# Altium PCB bms_slave.PcbDoc (part 2 of 2)
Units mm, origin at the board's own origin, x right, y up, seen from the top; angles counter-clockwise.
Board outline 145.01 x 85.89 mm, 4 copper layers (Top, Internal Plane 1, Internal Plane 2, Bottom), stack 2.023 mm thick; 168 components, 117 nets, 483 pads, 146 vias.
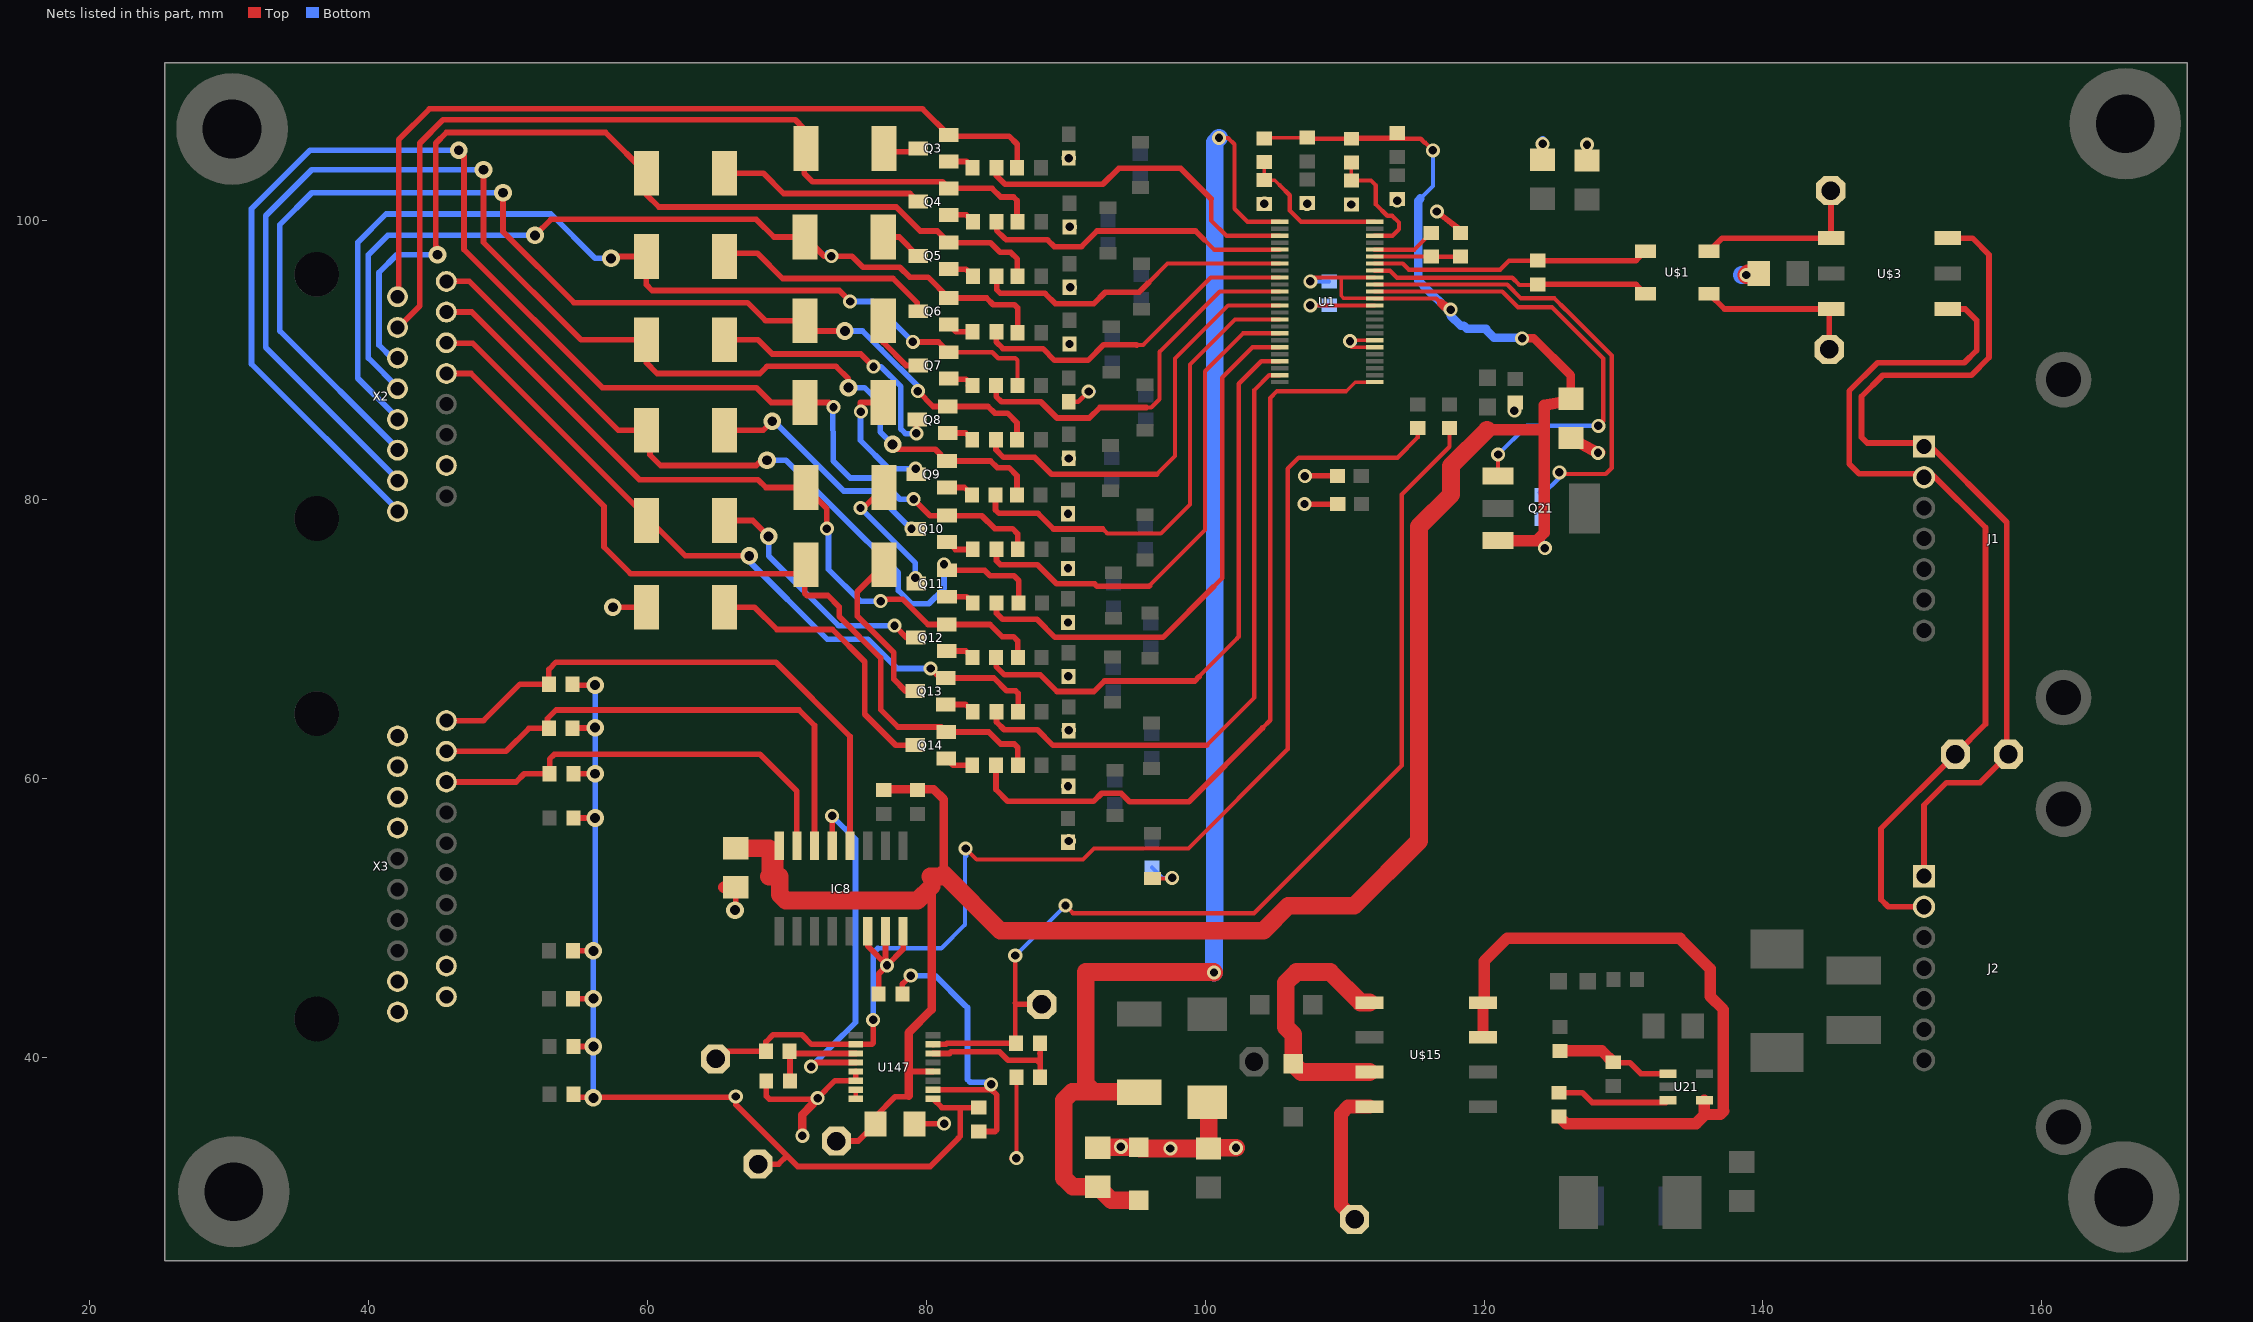
[diagram p4: the nets of this part, all layers, seen from the top]

## Via types
v1: diameter 1.006/1.006 (per signal layer), hole 0.6, Top to Bottom, 118 vias
v2: diameter 1.27, hole 0.711, Top to Bottom, 27 vias
v3: diameter 1.27/1.27 (per signal layer), hole 0.711, Top to Bottom, 1 vias

## Nets (pads, with @x,y where several pads share a name; then routed paths per layer and width w, separated by ;. In a path a pad name is that pad's centre, name@x,y a point inside that pad or via, vN(x,y) a via of type N, cw(c..) or ccw(c..) an arc to the next point about the centre after c; other vN are vias at no path point) (continued)
NetIC8_12: IC8.12 R74.1 X3.1 | length 41.4
  Top w0.305: R74.1@52.82,66.878 R74.1@52.846,66.853
  Top w0.406: X3.1@45.593,64.135 48.26,64.135 50.876,66.751 R74.1@52.947,66.751 52.947,67.806 53.467,68.326 63.5,68.326 69.215,68.326 74.536,63.005 IC8.12@74.536,55.169 ; R74.1@52.846,66.853 R74.1@52.857,66.841
NetIC8_13: IC8.13 U147.12 | length 25.5
  Top w0.406: v1(71.755,39.319) 71.78,39.319 72.085,39.624 74.951,39.624 U147.12@74.956,39.619 ; v1(73.254,57.302) 73.266,57.29 IC8.13@73.266,55.169
  Bottom w0.406: v1(71.755,39.319) 73.254,40.818 74.93,42.494 74.93,55.626 v1(73.254,57.302)
NetIC8_14: IC8.14 R73.1 X3.3 | length 37.2
  Top w0.406: X3.3@45.593,61.935 49.87,61.935 51.511,63.576 R73.1@52.947,63.576 ; R73.1@52.846,63.602 52.846,64.276 53.467,64.897 70.891,64.897 71.996,63.792 IC8.14@71.996,55.169
NetIC8_15: IC8.15 R72.1 X3.5 | length 31.6
  Top w0.406: X3.5@45.593,59.735 50.591,59.735 51.181,60.325 R72.1@52.998,60.325 52.998,61.38 53.34,61.722 64.592,61.722 68.072,61.722 70.726,59.068 IC8.15@70.726,55.169
NetJ1_1: J1.1 J2.1 TP3.TP U$3.P$3 | length 66.3
  Top w0.406: J2.1@151.544,52.985 151.544,58.072 153.162,59.69 155.575,59.69 TP3.TP@157.607,61.722 157.48,61.849 157.48,78.359 151.799,84.04 147.481,84.04 147.066,84.455 147.066,87.376 148.59,88.9 154.94,88.9 156.21,90.17 156.21,97.536 155.016,98.73 U$3.P$3@153.264,98.73
NetJ1_2: J1.2 J2.2 TP4.TP U$3.P$1 | length 64.9
  Top w0.406: J2.2@151.544,50.785 148.986,50.785 148.463,51.308 148.463,56.388 TP4.TP@153.797,61.722 155.956,63.881 155.956,77.978 152.094,81.84 146.887,81.84 146.177,82.55 146.177,87.757 148.209,89.789 154.432,89.789 155.321,90.678 155.321,92.837 154.508,93.65 U$3.P$1@153.264,93.65
NetQ3_1: Q3.1 R36.1 | length 1.9
  Top w0.406: Q3.1@81.618,104.219 82.891,104.219 R36.1@83.326,103.784
NetQ3_2: Q3.2 R1.1 X2.2 | length 59.2
  Top w0.406: X2.2@42.176,94.553 42.176,105.803 44.374,108.001 58.903,108.001 79.736,108.001 Q3.2@81.618,106.119 81.692,106.045 85.941,106.045 86.526,105.46 R1.1@86.526,103.784
NetQ3_3: Q3.3 R6.2 | length 2.7
  Top w0.406: R6.2@76.841,104.927 79.177,104.927 Q3.3@79.418,105.169
NetQ4_1: Q4.1 R37.1 | length 1.9
  Top w0.406: Q4.1@81.618,100.396 82.866,100.396 R37.1@83.351,99.911
NetQ4_2: Q4.2 R6.1 R7.1 X2.4 | length 63.1
  Top w0.406: X2.4@42.176,92.353 43.688,93.865 43.688,105.537 45.364,107.213 66.192,107.213 70.612,107.213 71.247,106.578 R6.1@71.247,104.921 ; R6.1@71.241,104.927 R6.1@71.247,104.921 ; R7.1@86.552,99.911 86.512,99.95 86.512,101.422 86.258,101.676 85.344,101.676 84.724,102.296 Q4.2@81.618,102.296 81.146,102.768 71.857,102.768 71.247,103.378 R6.1@71.247,104.921
NetQ4_3: Q4.3 R8.2 | length 14.7
  Top w0.406: R8.2@65.532,103.378 68.326,103.378 69.774,101.93 69.977,101.93 78.834,101.93 Q4.3@79.418,101.346
NetQ5_1: Q5.1 R38.1 | length 1.9
  Top w0.406: Q5.1@81.618,96.51 82.841,96.51 R38.1@83.351,95.999
NetQ5_2: Q5.2 R8.1 R9.1 X2.6 | length 66.2
  Top w0.406: v2(44.958,97.536) 44.958,98.044 44.831,98.171 44.831,105.537 45.593,106.299 57.011,106.299 R8.1@59.932,103.378 ; R8.1@59.932,101.866 60.833,100.965 68.713,100.965 77.851,100.965 79.578,99.238 80.79,99.238 Q5.2@81.618,98.41 84.597,98.41 85.293,97.714 86.055,97.714 86.538,97.231 86.538,96.013 R9.1@86.552,95.999
  Bottom w0.406: X2.6@42.176,90.153 41.673,90.153 40.767,91.059 40.767,96.266 42.037,97.536 v2(44.958,97.536)
NetQ5_3: Q5.3 R10.2 | length 3.1
  Top w0.406: R10.2@76.917,98.806 78.072,98.806 Q5.3@79.418,97.46
NetQ6_1: Q6.1 R39.1 | length 1.9
  Top w0.406: Q6.1@81.618,92.535 82.141,92.011 R39.1@83.326,92.011
NetQ6_2: Q6.2 R10.1 R11.1 X2.8 | length 62.9
  Top w0.406: v2(51.943,98.933) 53.086,100.076 67.818,100.076 69.088,98.806 R10.1@71.317,98.806 72.689,97.434 v1(73.203,97.434) 74.676,97.434 75.463,96.647 78.105,96.647 78.816,95.936 80.117,95.936 Q6.2@81.618,94.435 84.331,94.435 84.811,93.955 86.335,93.955 86.563,93.726 86.563,91.96 R11.1@86.552,91.948
  Bottom w0.406: X2.8@42.176,87.953 40.005,90.124 40.005,97.536 41.402,98.933 v2(51.943,98.933) ; v1@72.949,97.688 v1(73.203,97.434)
NetQ6_3: Q6.3 R12.2 | length 16
  Top w0.406: R12.2@65.538,97.409 65.773,97.644 67.894,97.644 69.704,95.834 77.622,95.834 79.35,94.107 79.35,93.553 Q6.3@79.418,93.485
NetQ7_1: Q7.1 R40.1 | length 2.2
  Top w0.305: Q7.1@81.618,88.649 Q7.1@81.646,88.621 ; R40.1@82.982,88.163 R40.1@83.313,88.163
  Top w0.406: Q7.1@81.646,88.621 82.856,88.621 R40.1@83.313,88.163
NetQ7_2: Q7.2 R12.1 R13.1 X2.10 | length 69.5
  Top w0.305: Q7.2@81.618,90.548 84.737,90.548 85.166,90.119 86.385,90.119 86.538,89.967 R13.1@86.539,88.163 R13.1@86.539,88.163
  Top w0.406: v2(57.404,97.282) 57.531,97.409 R12.1@59.938,97.409 59.938,95.383 60.35,94.971 68.58,94.971 73.762,94.971 v1(74.549,94.183) ; v1(79.045,91.288) 80.879,91.288 Q7.2@81.618,90.548
  Bottom w0.406: X2.10@42.176,85.753 39.243,88.686 39.243,98.425 41.275,100.457 53.086,100.457 56.261,97.282 v2(57.404,97.282) ; v1(74.549,94.183) 76.149,94.183 v1(79.045,91.288)
NetQ7_3: Q7.3 R14.2 | length 4.7
  Top w0.406: R14.2@76.917,92.812 76.937,92.792 76.937,91.237 78.575,89.599 Q7.3@79.418,89.599
NetQ8_1: Q8.1 R41.1 | length 1.9
  Top w0.406: Q8.1@81.555,84.762 82.815,84.762 R41.1@83.3,84.277
NetQ8_2: Q8.2 R14.1 R15.1 X2.12 | length 83.4
  Top w0.406: v2(49.657,101.981) 49.657,99.187 54.737,94.107 67.183,94.107 68.478,92.812 R14.1@71.317,92.812 71.298,92.792 72.015,92.075 v2(74.168,92.075) ; v1(79.4,87.757) 80.495,86.662 Q8.2@81.555,86.662 84.432,86.662 84.912,86.182 85.827,86.182 86.512,85.496 86.512,84.291 R15.1@86.526,84.277
  Bottom w0.406: X2.12@42.176,83.553 33.655,92.074 33.655,99.695 35.941,101.981 v2(49.657,101.981) ; v2(74.168,92.075) 75.438,92.075 76.759,90.754 79.4,88.113 v1(79.4,87.757)
NetQ8_3: Q8.3 R16.2 | length 19.3
  Top w0.406: R16.2@65.538,91.44 67.945,91.44 68.961,90.424 73.025,90.424 75.311,90.424 v1(76.225,89.51) ; v1(79.299,84.734) 79.299,85.657 Q8.3@79.354,85.712
  Bottom w0.406: v1(76.225,89.51) 76.759,89.51 78.181,88.087 78.181,85.039 78.511,84.709 79.273,84.709 v1(79.299,84.734)
NetQ9_1: Q9.1 R42.1 | length 2
  Top w0.406: Q9.1@81.491,80.851 82.739,80.851 R42.1@83.275,80.315
NetQ9_2: Q9.2 R16.1 R17.1 X2.14 | length 94.6
  Top w0.406: v2(48.26,103.632) 48.26,98.425 55.245,91.44 R16.1@59.938,91.44 59.938,89.795 60.706,89.027 68.072,89.027 68.58,89.535 73.533,89.535 74.422,88.646 v2(74.422,88.011) ; v2(77.597,83.947) 77.953,83.591 80.65,83.591 Q9.2@81.491,82.751 84.61,82.751 85.09,82.271 85.928,82.271 86.512,81.686 86.512,80.326 R17.1@86.501,80.315
  Bottom w0.406: X2.14@42.176,81.353 32.639,90.89 32.639,100.33 35.941,103.632 v2(48.26,103.632) ; v2(74.422,88.011) 75.565,88.011 76.708,86.868 76.708,84.836 v2(77.597,83.947)
NetQ9_3: Q9.3 R18.2 | length 9.6
  Top w0.406: v1(75.311,86.284) 75.292,86.944 R18.2@76.917,86.944 ; v1(79.248,82.194) 79.291,82.151 Q9.3@79.291,81.801
  Bottom w0.406: v1(75.311,86.284) 75.286,85.369 75.286,84.226 77.318,82.194 v1(79.248,82.194)
NetQ10_1: Q10.1 R43.1 | length 2.1
  Top w0.406: Q10.1@81.491,76.926 81.57,76.926 82.093,76.403 83.326,76.403 R43.1@83.338,76.416
NetQ10_2: Q10.2 R18.1 R19.1 X2.16 | length 108.3
  Top w0.305: Q10.2@81.491,78.826 84.038,78.826 84.938,77.927 86.208,77.927 86.538,77.597 86.538,76.505 86.538,76.442 R19.1@86.564,76.416
  Top w0.406: v2(46.482,105.029) 46.863,104.648 46.863,97.917 56.769,88.011 67.818,88.011 68.885,86.944 R18.1@71.317,86.944 73.025,86.944 v1(73.355,86.614) v1@73.381,86.589 ; v1(79.096,80.01) 80.279,78.826 Q10.2@81.491,78.826 83.988,78.826 84.912,77.902 86.182,77.902 86.563,77.521 R19.1@86.563,76.479 ; R19.1@86.538,76.505 R19.1@86.563,76.479 ; R19.1@86.639,76.403 R19.1@86.563,76.479
  Bottom w0.406: X2.16@42.176,79.153 31.623,89.706 31.623,100.838 35.814,105.029 v2(46.482,105.029) ; v1(73.355,86.614) 73.304,86.258 73.324,83.566 73.33,82.753 74.549,81.534 76.581,81.534 78.105,80.01 v1(79.096,80.01)
NetQ10_3: Q10.3 R20.2 | length 17
  Top w0.406: R20.2@65.792,84.963 68.326,84.963 v2(68.961,85.598) ; v1(78.943,77.902) 78.969,77.876 Q10.3@79.291,77.876
  Bottom w0.406: v2(68.961,85.598) 69.088,85.598 74.092,80.594 76.2,80.594 78.892,77.902 v1(78.943,77.902)
NetQ11_1: Q11.1 R44.1 | length 2
  Top w0.406: Q11.1@81.491,73.015 82.891,73.015 R44.1@83.338,72.568
NetQ11_2: Q11.2 R20.1 R21.1 X2.1 | length 57.1
  Top w0.406: X2.1@45.593,95.631 47.244,95.631 57.912,84.963 60.192,84.963 60.192,83.191 60.96,82.423 67.818,82.423 68.199,82.804 v2(68.58,82.804) ; v1(81.28,75.336) 81.491,75.125 Q11.2@81.491,74.915 84.191,74.915 84.582,74.524 86.284,74.524 86.639,74.168 86.639,72.605 R21.1@86.602,72.568
  Bottom w0.406: v2(68.58,82.804) 69.952,82.804 73.584,79.172 78.003,74.752 78.003,73.457 78.943,72.517 80.188,72.517 81.28,73.609 v1(81.28,75.336)
NetQ11_3: Q11.3 R22.2 | length 9.4
  Top w0.406: v1(75.286,79.375) 75.495,79.375 R22.2@76.968,80.848 ; v1(79.223,74.371) 79.291,74.303 Q11.3@79.291,73.965
  Bottom w0.406: v1(75.286,79.375) 79.223,75.438 v1(79.223,74.371)
NetQ12_1: Q12.1 R45.1 | length 2
  Top w0.406: Q12.1@81.466,69.129 82.841,69.129 R45.1@83.313,68.656
NetQ12_2: Q12.2 R22.1 R23.1 X2.3 | length 55.8
  Top w0.406: X2.3@45.593,93.427 47.416,93.427 59.436,81.407 67.945,81.407 68.504,80.848 R22.1@71.368,80.848 R22.1@71.374,80.842 ; R22.1@71.374,79.553 R22.1@71.374,80.842 ; v1(72.873,77.902) 72.873,79.344 R22.1@71.374,80.842 ; v1(76.733,72.695) 76.886,72.847 78.308,72.847 80.127,71.029 Q12.2@81.466,71.029 84.572,71.029 85.446,70.155 86.258,70.155 86.563,69.85 86.563,68.67 R23.1@86.577,68.656
  Bottom w0.406: v1(72.873,77.902) 73,77.775 73,74.981 75.286,72.695 v1(76.733,72.695)
NetQ13_1: Q13.1 R46.1 | length 2.2
  Top w0.406: Q13.1@81.402,65.293 82.815,65.293 R46.1@83.338,64.77
NetQ13_2: Q13.2 R24.1 R25.1 X2.5 | length 52.9
  Top w0.406: X2.5@45.593,91.186 47.492,91.186 62.732,75.946 v2(67.31,75.946) ; v1(80.315,67.869) 80.99,67.193 Q13.2@81.402,67.193 84.851,67.193 85.776,66.269 86.411,66.269 86.589,66.091 86.589,64.782 R25.1@86.577,64.77
  Bottom w0.406: v2(67.31,75.946) 67.31,75.565 72.898,69.977 75.819,69.977 77.927,67.869 v1(80.315,67.869)
NetQ13_3: Q13.3 R26.2 | length 11.9
  Top w0.406: R26.2@76.917,75.235 75.057,73.375 75.057,71.628 77.673,69.012 77.673,67.107 78.537,66.243 Q13.3@79.202,66.243
NetQ14_1: Q14.1 R47.1 | length 2.1
  Top w0.406: Q14.1@81.428,61.42 81.925,60.922 R47.1@83.3,60.922
NetQ14_2: Q14.2 R26.1 R27.1 X2.7 | length 59.3
  Top w0.406: X2.7@45.593,89.027 47.371,89.027 56.896,79.502 56.896,76.581 58.801,74.676 70.758,74.676 71.298,75.215 71.298,73.254 71.45,73.101 72.949,73.101 73.762,72.288 73.762,71.603 76.733,68.631 76.733,64.922 77.978,63.678 81.069,63.678 Q14.2@81.428,63.32 84.483,63.32 85.344,62.459 86.309,62.459 86.563,62.205 86.563,60.936 R27.1@86.577,60.922
NetQ14_3: Q14.3 R28.2 | length 20
  Top w0.406: R28.2@65.538,72.263 67.691,72.263 69.291,70.663 71.888,70.663 73.279,70.663 75.59,68.351 75.59,64.592 77.813,62.37 Q14.3@79.227,62.37
NetQ21_1: Q21.1 U1.38 | length 33
  Top w0.305: U1.38@112.149,94.904 121.301,94.904 122.428,93.777 124.866,93.777 128.549,90.094 128.549,85.623 v1(128.194,85.268) ; Q21.1@121.006,81.661 v1(121.006,83.21)
  Bottom w0.305: v1(121.006,83.21) 123.063,85.268 v1(128.194,85.268)
NetR33_1: R33.1 U21.4 U$15.P$5 U$15.P$6 | length 58.4
  Top w0.813: U$15.P$6@119.925,41.429 U$15.P$5@119.925,43.919 120.015,44.009 120.015,46.888 121.666,48.539 134.061,48.539 134.061,48.489 136.22,46.33 136.22,44.348 137.16,43.409 137.16,36.195 137.211,36.144 136.957,35.89 135.814,35.89 135.128,35.204 125.882,35.204 125.374,35.712 R33.1@125.374,35.752 125.896,35.23 135.204,35.23 135.793,35.819 U21.4@135.793,36.921
NetR33_2: R33.2 U21.3 | length 8.2
  Top w0.406: R33.2@125.374,37.451 127.065,37.451 127.762,36.754 133.025,36.754 U21.3@133.193,36.921
NetR34_1: R34.1 R35.2 U21.1 | length 8.6
  Top w0.406: R35.2@129.132,39.765 R35.2@129.261,39.636 129.298,39.599 130.454,39.599 131.232,38.821 U21.1@133.193,38.821
  Top w0.813: R34.1@125.451,40.451 128.446,40.451 R35.2@129.261,39.636
NetR36_2: R36.2 U1.3 | length 24.5
  Top w0.305: 100.432,101.549 100.432,100 101.528,98.904 U1.3@105.349,98.904
  Top w0.406: R36.2@85.025,103.784 85.025,103.214 85.649,102.591 92.659,102.591 93.802,103.734 98.247,103.734 100.432,101.549
NetR37_2: R37.2 U1.5 | length 22.4
  Top w0.305: 99.949,98.603 100.648,97.904 U1.5@105.349,97.904
  Top w0.406: R37.2@85.051,99.911 85.051,99.277 85.598,98.73 85.623,98.73 85.75,98.603 88.697,98.603 89.179,98.12 91.135,98.12 92.253,99.238 99.314,99.238 99.949,98.603
NetR38_2: R38.2 U1.7 | length 22.9
  Top w0.305: 95.936,95.529 97.31,96.904 U1.7@105.349,96.904
  Top w0.406: R38.2@85.051,95.999 85.051,95.035 85.319,94.767 88.519,94.767 89.256,94.031 92.024,94.031 92.837,94.844 95.25,94.844 95.936,95.529
NetR39_2: R39.2 U1.9 | length 24.1
  Top w0.305: 95.098,91.059 95.555,91.059 100.399,95.904 U1.9@105.349,95.904
  Top w0.406: R39.2@85.025,92.011 85.025,91.276 85.496,90.805 88.367,90.805 89.205,89.967 91.592,89.967 92.71,91.084 95.072,91.084 95.098,91.059
NetR40_2: R40.2 U1.11 | length 27.5
  Top w0.305: 95.783,86.589 96.139,86.589 96.723,87.173 96.723,90.576 101.05,94.904 U1.11@105.349,94.904
  Top w0.406: R40.2@85.013,88.163 85.013,87.377 85.395,86.995 88.214,86.995 89.256,85.954 89.256,85.928 89.281,85.903 89.306,85.903 89.383,85.827 91.694,85.827 92.456,86.589 95.783,86.589
NetR41_2: R41.2 U1.13 | length 30.9
  Top w0.305: 96.52,81.788 97.841,83.109 97.841,90.094 101.651,93.904 U1.13@105.349,93.904
  Top w0.406: R41.2@85,84.277 85,83.554 85.547,83.007 87.782,83.007 89.002,81.788 96.52,81.788
NetR42_2: R42.2 U1.15 | length 34.4
  Top w0.305: 92.659,77.876 92.989,77.546 96.825,77.546 98.908,79.629 98.908,89.662 102.149,92.904 U1.15@105.349,92.904
  Top w0.406: R42.2@84.975,80.315 84.975,79.236 85.217,78.994 88.011,78.994 89.129,77.876 92.659,77.876
NetR43_2: R43.2 U1.17 | length 36.1
  Top w0.305: 96.012,73.812 100,77.8 100,89.179 102.724,91.904 U1.17@105.349,91.904
  Top w0.406: R43.2@85.038,76.416 85.038,75.591 85.319,75.311 87.986,75.311 89.357,73.939 92.075,73.939 92.253,73.762 95.961,73.762 96.012,73.812
NetR44_2: R44.2 U1.19 | length 38.8
  Top w0.305: 100.609,73.736 101.219,74.346 101.219,88.722 103.4,90.904 U1.19@105.349,90.904
  Top w0.406: R44.2@85.038,72.568 85.038,71.832 85.471,71.399 87.935,71.399 89.23,70.104 96.977,70.104 100.609,73.736
NetR45_2: R45.2 U1.21 | length 42.2
  Top w0.305: 99.568,67.285 102.26,69.977 102.26,70.002 102.413,70.155 102.413,88.29 104.026,89.904 U1.21@105.349,89.904
  Top w0.406: R45.2@85.013,68.656 85.013,68.022 85.623,67.412 88.189,67.412 89.383,66.218 92.024,66.218 92.786,66.98 99.263,66.98 99.568,67.285
NetR46_2: R46.2 U1.23 | length 45.7
  Top w0.305: 100.101,62.357 103.53,65.786 103.53,87.833 104.601,88.904 U1.23@105.349,88.904
  Top w0.406: R46.2@85.038,64.77 85.038,64.034 85.598,63.475 87.986,63.475 89.103,62.357 100.101,62.357
NetR47_2: R47.2 U1.25 | length 55.7
  Top w0.254: 110.109,87.757 110.756,88.404 U1.25@112.149,88.404
  Top w0.305: 104.115,63.602 104.673,64.16 104.673,87.274 105.156,87.757 110.109,87.757
  Top w0.406: R47.2@85,60.922 85,59.196 85.852,58.344 91.999,58.344 92.583,58.928 93.98,58.928 94.59,58.318 98.831,58.318 104.115,63.602
NetR53_2: R53.2 R58.1 TP5.TP U147.7 | length 73.7
  Top w0.305: v1(86.385,47.295) 86.385,43.891 86.385,41.073 R58.1@86.45,41.008 ; v1(89.992,50.876) 90.5,50.368 90.5,50.317 103.505,50.317 114.097,60.909 114.097,80.34 117.526,83.769 R53.2@117.526,85.104
  Top w0.406: U147.7@80.492,40.919 U147.7@80.516,40.894 ; U147.7@80.492,40.919 81.407,40.919 81.496,41.008 R58.1@86.45,41.008 ; 86.385,43.891 86.487,43.79 TP5.TP@88.29,43.79
  Bottom w0.305: v1(86.385,47.295) 86.411,47.295 v1(89.992,50.876)
NetR54_2: R54.2 R57.1 TP6.TP U147.10 | length 90.4
  Top w0.305: v1(82.829,54.966) 83.617,54.178 91.237,54.178 92.024,54.966 98.806,54.966 105.918,62.078 105.918,82.194 106.705,82.982 113.792,82.982 115.24,84.43 R54.2@115.24,85.104
  Top w0.406: TP6.TP@64.897,39.878 65.443,40.424 R57.1@68.505,40.424 68.505,41.098 69.012,41.605 71.095,41.605 71.781,40.919 U147.10@74.956,40.919 76.098,40.919 76.2,41.021 v1(76.2,42.672)
  Bottom w0.305: 76.53,47.803 81.077,47.803 82.779,49.505 82.779,54.915 v1(82.829,54.966)
  Bottom w0.406: v1(76.2,42.672) 76.2,43.485 76.2,47.473 76.53,47.803 ; 82.829,54.432 v1(82.829,54.966)
NetR55_2: R55.2 R56.2 U147.2 | length 26.8
  Top w0.406: R55.2@78.294,44.526 78.294,45.249 v1(78.892,45.847) ; R56.2@83.769,34.685 83.783,34.671 84.938,34.671 85.065,34.798 85.065,37.287 84.683,37.669 U147.2@80.492,37.669 84.659,37.669 84.684,37.694 84.658,37.643 v1(84.658,38.049)
  Bottom w0.406: v1(78.892,45.847) 80.645,45.847 82.804,43.688 82.829,43.688 82.956,43.561 82.956,38.405 83.16,38.202 84.506,38.202 v1(84.658,38.049)
NetR56_1: R56.1 R67.2 R68.2 R69.2 R70.2 R71.2 R72.2 R73.2 R74.2 TP7.TP U147.1 | length 79.8
  Top w0.406: R74.2@54.545,66.663 56.249,66.663 v2(56.261,66.675) ; R73.2@54.596,63.551 54.545,63.602 56.236,63.602 v2(56.261,63.627) ; R69.2@54.659,44.196 v2(56.134,44.196) ; R70.2@54.659,47.625 v2(56.134,47.625) ; R67.2@54.698,37.338 54.901,37.135 64.262,37.135 66.294,37.135 v1(66.345,37.186) 66.345,36.601 70.015,32.931 ; R68.2@54.698,40.767 v2(56.134,40.767) ; R71.2@54.698,57.15 v2(56.261,57.15) ; R72.2@54.698,60.325 v2(56.261,60.325) ; TP7.TP@67.945,32.334 69.418,32.334 70.015,32.931 ; U147.1@80.492,37.019 81.126,36.384 82.347,36.384 ; R56.1@83.769,36.384 82.347,36.384 ; 70.015,32.931 70.79,32.156 80.289,32.156 82.321,34.188 82.321,34.214 82.448,34.341 82.448,36.283 82.347,36.384
  Bottom w0.406: v2(56.134,37.084) v2(56.134,40.767) v2(56.134,44.196) v2(56.134,47.625) 56.261,47.752 v2(56.261,57.15) v2(56.261,60.325) v2(56.261,63.627) v2(56.261,66.675)
NetR57_2: R57.2 R59.2 U147.11 | length 7
  Top w0.406: R59.2@70.23,38.291 70.23,40.399 R57.2@70.205,40.424 70.36,40.269 U147.11@74.956,40.269
NetR58_2: R58.2 R60.2 U147.6 | length 10.6
  Top w0.406: U147.6@80.492,40.269 81.671,40.269 81.788,40.386 85.268,40.386 85.877,39.776 87.946,39.776 88.073,39.649 88.175,39.751 ; R58.2@88.15,41.008 88.175,40.983 88.175,40.259 ; 88.165,40.269 88.175,40.259 ; R60.2@88.175,38.557 88.175,39.751 ; 88.175,39.751 88.175,40.259
NetR61_1: R61.1 R62.2 U1.43 | length 6.2
  Top w0.305: U1.43@112.149,97.404 116.199,97.404 R62.2@116.205,97.397 R61.1@118.313,97.397
NetR62_1: R62.1 U1.44 | length 4.6
  Top w0.305: U1.44@112.149,97.904 115.011,97.904 R62.1@116.205,99.097
NetR63_1: R63.1 U1.36 | length 7.3
  Top w0.254: v1(107.544,93.904) 108.89,93.918
  Top w0.305: v1(107.544,93.904) 108.915,93.904 U1.36@112.149,93.904
  Bottom w0.305: v1(107.544,93.904) 107.557,93.918 R63.1@108.89,93.918
NetR66_1: R66.1 U1.39 | length 33.6
  Top w0.305: U1.39@112.149,95.404 121.665,95.404 122.657,94.412 125.044,94.412 125.857,93.599 125.882,93.599 129.159,90.322 129.159,82.245 128.727,81.813 125.527,81.813 v1(125.4,81.94)
  Bottom w0.305: R66.1@123.977,80.479 R66.1@124.155,80.301 125.4,81.546 v1(125.4,81.94)
NetR75_2: R75.2 R80.1 U1.46 | length 9.2
  Top w0.254: R75.2@110.49,104.154 R80.1@110.49,102.856 R80.1@110.502,102.845
  Top w0.305: R80.1@110.49,102.856 110.504,102.87 111.887,102.87 112.243,102.514 112.243,101.143 113.055,100.33 113.411,100.33 113.894,99.847 113.894,99.365 113.432,98.904 U1.46@112.149,98.904
NetR78_2: R78.2 R82.1 U1.48 | length 11.1
  Top w0.254: R78.2@104.242,104.179 R82.1@104.242,102.882 104.253,102.87 105.004,102.87 105.359,102.514
  Top w0.305: 105.359,102.514 106.07,101.803 106.07,100.711 106.878,99.904 U1.48@112.149,99.904
NetR83_1: R83.1 U1.41 U$1.P$4 | length 20.1
  Top w0.305: U1.41@112.149,96.404 112.16,96.393 113.259,96.393 113.767,95.885 122.022,95.885 122.53,95.377 123.811,95.377 R83.1@123.85,95.416
  Top w0.406: R83.1@123.85,95.416 130.898,95.416 U$1.P$4@131.572,94.742
NetR83_2: R83.2 U1.42 U$1.P$1 | length 20.1
  Top w0.305: U1.42@112.149,96.904 114.17,96.904 114.605,96.469 121.158,96.469 121.793,97.104 123.839,97.104 R83.2@123.85,97.116
  Top w0.406: R83.2@123.85,97.116 130.898,97.116 U$1.P$1@131.572,97.79
NetTP1_TP: TP1.TP U$1.P$2 U$3.P$4 | length 12.5
  Top w0.406: U$1.P$2@136.144,97.79 137.084,98.73 U$3.P$4@144.882,98.73 144.882,102.108 TP1.TP@144.856,102.133
NetTP2_TP: TP2.TP U$1.P$3 U$3.P$6 | length 12.1
  Top w0.406: U$1.P$3@136.144,94.742 137.236,93.65 U$3.P$6@144.882,93.65 144.755,93.523 TP2.TP@144.755,90.754
NetU147_15: U147.15 U147.16 | length 0.6
  Top w0.305: U147.16@74.956,37.019 U147.15@74.956,37.669
NetU$15_P$2: U$15.P$2 U$15.P$4 Z2.A | length 19
  Top w1.27: 109.83,38.964 109.855,38.939 ; U$15.P$2@111.785,38.939 109.855,38.939 ; U$15.P$4@111.785,43.919 111.148,43.919 108.966,46.101 106.553,46.101 105.791,45.339 105.791,42.164 106.324,41.631 Z2.A@106.324,39.517 106.903,38.939 109.855,38.939
Q12: Q12.3 R24.2 | length 17.8
  Top w0.406: R24.2@65.792,78.486 67.564,78.486 v2(68.707,77.343) ; v1(77.724,70.942) 78.588,70.079 Q12.3@79.266,70.079
  Bottom w0.406: v2(68.707,77.343) 68.707,75.946 73.711,70.942 v1(77.724,70.942)
V+: C41.1 R32.1 U1.1 Z1.C | length 104.9
  Top w0.305: v1(100.99,105.918) 101.651,105.918 102.108,105.461 102.108,100.838 103.042,99.904 U1.1@105.349,99.904
  Top w1.27: Z1.C@95.25,29.748 93.261,29.748 C41.1@92.304,30.706 90.503,30.706 89.865,31.344 89.865,36.906 90.475,37.516 91.999,37.516 ; R32.1@95.275,37.484 95.244,37.516 91.999,37.516 ; v1(100.635,46.076) 100.609,46.101 91.44,46.101 91.44,38.075 91.999,37.516
  Bottom w1.27: v1(100.635,46.076) 100.635,49.098 100.686,49.149 100.686,105.613 v1(100.99,105.918)
V-: C1.- C2.2 C4.2 C5.2 C6.2 C7.2 C8.2 C9.2 C10.2 C11.2 C12.2 C13.2 C14.2 C15.2 C16.2 C17.2 C18.2 C19.2 C22.2 C23.2 C41.2 C42.2 C43.2 C50.2 D19.A IC8.6 IC8.7 IC8.8 R28.1 R55.1 R59.1 R60.1 R61.2 R79.2 R80.2 R81.2 R82.2 R85.1 R87.1 U1.30 U1.31 U147.13 U147.14 U$15.P$1 V-.TP X2.13 X3.2 X3.4 X3.6 X3.8 X3.17 X3.18 X3.19 X3.20 Z1.A | length 89
  Top w0.254: v1(110.388,91.338) 110.084,91.389 v1@110.49,91.364 ; U1.30@112.149,90.904 110.781,90.907 110.49,90.907 v1@110.49,91.364 ; U1.31@112.149,91.404 110.476,91.404 v1@110.49,91.364
  Top w0.305: v1(86.462,32.766) 86.411,32.715 86.081,32.715 86.335,32.969 86.487,32.969 86.475,32.981 R60.1@86.475,38.557 ; v1(90.17,59.436) 90.184,59.399 C16.2@90.195,59.424 ; v1(90.17,71.171) 90.017,71.146 v1(90.17,71.171) ; C12.2@90.17,75.045 90.105,75.045 v1(90.17,75.057) ; v1(90.17,78.969) 90.069,78.995 v1(90.17,78.969) ; C14.2@90.195,67.298 90.156,67.324 v1(90.195,67.31) ; v1(90.221,55.499) 90.298,55.5 v1(90.221,55.499) ; C15.2@90.221,63.412 90.131,63.438 v1(90.221,63.449) ; v1(90.221,82.931) 90.296,82.881 C10.2@90.221,82.957 ; C8.2@90.221,86.996 90.908,86.996 v1(91.643,87.732) ; v1(90.272,91.135) 90.527,91.136 v1(90.272,91.135) ; C5.2@90.272,95.2 90.298,95.175 v1(90.322,95.199) ; D19.A@96.228,52.807 97.587,52.807 v1(97.638,52.857) ; v1(113.767,101.422) 113.702,101.207 R79.2@113.767,101.538
  Top w0.406: v2(57.531,72.263) R28.1@59.938,72.263 ; v2(66.294,50.546) 66.345,50.597 C6.2@66.345,52.181 ; R59.1@68.53,38.291 68.53,37.21 68.758,36.982 72.136,36.982 v1(72.212,37.059) 73.472,38.319 U147.14@74.956,38.319 U147.13@74.956,38.969 ; IC8.6@75.806,49.022 75.806,47.968 v1(77.191,46.584) ; R55.1@76.595,44.526 76.595,45.988 v1(77.191,46.584) ; IC8.7@77.076,49.022 77.076,46.698 v1(77.191,46.584) ; IC8.8@78.346,49.022 78.346,47.739 v1(77.191,46.584) ; C42.2@79.162,35.217 81.28,35.242 v1(81.293,35.23) ; v1(90.221,104.47) v1(90.221,104.47) ; C4.2@90.272,99.531 90.184,99.556 v1(90.297,99.543) ; v1(107.124,79.667) 107.112,79.654 C19.2@109.513,79.654 ; v1(107.15,81.661) 107.175,81.686 C18.2@109.488,81.686 ; v1(116.611,100.635) 118.313,99.314 R61.2@118.313,99.097 ; R85.1@122.085,86.525 R85.1@122.237,86.933
  Top w0.61: v1(71.12,34.366) 71.12,35.89 71.857,36.627 71.857,36.703 v1(72.212,37.059) ; R82.2@104.242,101.182 v1(104.242,101.194) ; v1(107.315,101.194) R81.2@107.315,101.233 ; v1(110.49,101.143) R80.2@110.49,101.157 ; C22.2@124.181,104.346 124.181,105.461 v1(124.206,105.486) ; C23.2@127.381,104.295 v1(127.381,105.435)
  Top w0.813: C6.2@65.491,52.181 C6.2@66.345,52.181 ; C50.2@126.238,84.401 126.241,84.376 v1(128.168,83.337) v1@128.298,83.363
  Top w1: V-.TP@110.719,28.372 109.728,29.362 109.728,35.941 110.236,36.449 U$15.P$1@111.785,36.449
  Top w1.27: C41.2@92.304,33.506 92.347,33.548 Z1.A@95.25,33.548 95.344,33.455 C2.2@100.254,33.455 ; C1.-@100.152,36.779 100.254,36.677 C2.2@100.254,33.455 ; v1(102.21,33.503) 100.302,33.503 C2.2@100.254,33.455 ; v1(138.811,96.088) 138.913,96.19 C43.2@139.697,96.19
  Bottom w0.254: v1(110.388,91.338) v1@110.769,91.211
  Bottom w0.305: v1(86.462,32.766) 86.462,32.893 v1@86.487,32.918 ; v1@90.145,55.499 v1(90.221,55.499) ; v1(90.17,59.436) 90.195,59.411 v1@90.195,59.385 ; v1(90.17,71.171) v1@90.221,71.171 ; v1(90.17,75.057) v1@90.272,74.981 ; v1(90.17,78.969) v1@90.297,79.019 ; v1@90.195,63.424 v1(90.221,63.449) ; v1(90.195,67.31) 90.221,67.31 v1@90.246,67.285 ; v1@90.195,82.906 90.145,82.956 v1(90.221,82.931) ; v1(90.272,91.135) v1@90.322,91.008 ; v1(90.322,95.199) v1@90.373,95.225 ; v1(91.643,87.732) v1@92.024,87.732 ; R87.1@96.19,53.608 96.94,52.857 v1(97.638,52.857)
  Bottom w0.406: 71.857,36.627 72.212,36.982 v1(72.212,37.059) ; v1@77.165,46.634 77.191,46.609 v1(77.191,46.584) ; v1@81.14,35.154 v1(81.293,35.23) ; v1@90.195,104.496 v1(90.221,104.47) ; v1@90.297,99.517 90.348,99.568 v1(90.297,99.543) ; v1@106.959,81.724 107.023,81.661 v1(107.15,81.661) ; v1@107.112,79.692 v1(107.124,79.667) ; v1(116.611,100.635) 116.688,100.736 v1@116.662,100.762
  Bottom w0.61: v1(124.206,105.486) v1@124.206,105.74 ; v1(127.381,105.435) v1@127.381,105.486
  Bottom w1.27: v1@138.481,96.088 v1(138.811,96.088)
  other v1: 97.511,33.452 93.955,33.579 122.174,86.36
VREG: C6.1 C42.1 C50.1 IC8.16 Q21.3 R63.2 R64.2 R65.2 R66.2 R75.1 R76.1 R77.1 R78.1 U1.37 U1.40 U147.4 VREG.TP | length 211.5
  Top w0.254: R78.1@104.242,105.879 104.292,105.93 R77.1@107.315,105.93 107.391,105.853 R75.1@110.49,105.853 R75.1@110.566,105.93 ; 109.779,95.904 109.753,95.878 109.753,94.59 109.939,94.404 U1.37@112.149,94.404
  Top w0.305: R77.1@107.391,105.853 115.457,105.853 115.748,105.562 115.799,105.562 v1(116.332,105.029) ; v1(107.544,95.631) 107.816,95.904 109.779,95.904 U1.40@112.149,95.904 ; R75.1@110.566,105.93 113.487,105.93 R76.1@113.767,106.26 ; U1.37@112.149,94.404 116.569,94.404 117.132,93.84 ; C50.1@126.201,87.085 C50.1@126.238,87.201
  Top w0.406: VREG.TP@73.558,33.985 75.13,33.985 C42.1@76.362,35.217 76.362,35.747 77.775,37.16 78.664,37.16 78.74,37.236 ; R65.2@76.848,59.206 R64.2@78.956,59.206 ; 78.74,39.141 78.913,38.969 U147.4@80.492,38.969 ; 117.069,94.107 v1@117.17,93.802 ; 123.901,77.191 124.358,76.733 v1(124.358,76.505)
  Top w0.61: IC8.16@69.456,55.169 69.456,52.997 69.494,52.959 ; R65.2@76.848,59.206 80.544,59.206 81.255,58.496 81.255,53.137 81.432,52.959 ; 78.74,37.236 78.74,39.141 78.74,41.758 80.391,43.409 80.391,52.248 80.391,52.857 80.289,52.959 ; v1@117.17,93.802 117.132,93.84 116.916,94.056 v1(117.602,93.599) ; v1(122.733,91.542) 123.571,91.542 126.213,88.9 126.213,87.227 C50.1@126.238,87.201
  Top w0.813: 120.218,84.988 124.282,84.988 124.308,84.963 ; Q21.3@121.006,77.038 123.749,77.038 123.901,77.191 124.308,77.597 124.308,84.963 ; C50.1@126.201,87.085 124.308,86.741 124.308,84.963
  Top w1.27: C6.1@66.345,54.981 68.742,54.981 68.809,54.915 68.809,53.035 68.732,52.959 69.494,52.959 69.494,51.664 69.926,51.232 79.375,51.232 80.391,52.248 ; 80.289,52.959 81.077,52.959 81.255,53.137 ; 81.432,52.959 85.319,49.073 104.191,49.073 105.969,50.851 110.693,50.851 115.341,55.499 115.341,78.054 117.627,80.34 117.627,82.398 120.218,84.988
  Bottom w0.305: v1(107.544,95.631) 107.557,95.617 R63.2@108.89,95.617 ; 115.443,101.575 116.332,102.464 v1(116.332,105.029)
  Bottom w0.406: R66.2@124.155,78.601 124.155,76.708 v1(124.358,76.505)
  Bottom w0.61: 115.443,101.575 115.443,101.549 115.291,101.397 115.291,95.682 115.926,95.047 117.323,93.675 v1(117.602,93.599) 117.602,93.167 118.313,92.456 118.542,92.456 118.77,92.227 120.142,92.227 120.167,92.202 120.167,92.126 120.701,91.592 122.682,91.592 v1(122.733,91.542)
pads on no net: J1.0 J2.0 U147.8 U147.9 U$3.P$2 X2.9 X2.11 X2.15 X2.17 X2.18 X3.10 X3.12 X3.14 X3.16 X3.21 X3.22

## Polygon pours and split planes (outlines as drawn)
no net on bRestrict (solid): 117.475,46.025 111.305,46.025 111.276,35.956 117.475,36.052
GND on Internal Plane 1 (split plane): 166.878,35.433 160.401,35.433 160.401,25.91 121.412,25.91 121.412,69.723 134.239,69.723 134.239,77.216 134.239,88.265 166.878,88.265
V- on Internal Plane 1 (split plane): 142.875,90.805 132.842,90.805 132.842,90.678 131.826,90.678 131.826,77.724 116.713,77.724 116.713,77.47 116.586,77.47 116.586,25.91 35.433,25.91 35.433,35.433 25.91,35.433 25.91,101.219 35.433,101.219 35.433,110.782 142.875,110.782
GND on Internal Plane 2 (split plane): 166.878,35.433 160.401,35.433 160.401,25.91 121.412,25.91 121.412,35.56 121.412,46.101 121.412,69.723 134.239,69.723 134.239,75.946 134.239,88.265 166.878,88.265
V- on Internal Plane 2 (split plane): 142.875,90.805 131.826,90.805 131.826,88.265 131.826,77.724 116.586,77.724 116.586,69.723 116.586,46.101 111.252,46.101 111.252,35.56 116.586,35.56 116.586,25.91 35.433,25.91 35.433,35.433 25.91,35.433 25.91,101.219 35.433,101.219 35.433,110.782 142.875,110.782

## Keep-outs
Keep-Out Layer:
  the board outline again, w0

## Other copper
Internal Plane 1 (plane layer: these items are gaps in the copper):
  rectangle: 160.401,25.4 170.409,35.433
  rectangle: 25.4,25.4 35.433,35.433
  rectangle: 25.4,101.219 35.433,111.293
  rectangle: 142.875,88.265 170.053,110.871
  rectangle: 166.878,25.908 170.409,88.773
  rectangle: 116.586,25.527 121.412,77.47
  rectangle: 116.713,69.723 134.239,77.724
  rectangle: 131.826,77.216 134.239,90.678
  rectangle: 132.842,88.265 143.129,90.805
Internal Plane 2 (plane layer: these items are gaps in the copper):
  rectangle: 160.401,25.4 170.409,35.433
  rectangle: 25.4,101.219 35.433,111.293
  rectangle: 25.4,25.4 35.433,35.433
  rectangle: 166.878,25.4 170.409,89.662
  rectangle: 142.875,88.265 170.409,111.293
  rectangle: 131.826,88.265 143.637,90.805
  rectangle: 131.826,75.946 134.239,90.805
  rectangle: 116.586,69.723 134.239,77.724
  rectangle: 111.252,35.56 121.412,46.101
  rectangle: 116.586,25.146 121.412,77.724

## Silkscreen, mask and mechanical layers (free items; w line width, h text height)
Top Overlay:
  text "12 Cell BMS ISO-SPI Slave" at 80.43,108.445 h2.76
  text "Revision 3.0" at 122.199,53.873 h2.76
  text "Made in New Zealand by Chris Young" at 80.222,27.209 h1.57
Dimension:
  the board outline again, w0
Mechanical 17:
  lines w0.254: 25.4,25.4 25.4,111.379 170.434,111.379 170.409,111.354 170.409,25.425 170.384,25.4 25.4,25.4
tTest:

## Text inside footprints (layer, text, board x,y; h text height)
Q21: Top Assembly "2" at 120.587,80.104 h1.26 r90; Top Assembly "1" at 120.596,82.505 h1.26 r90; Top Assembly "4" at 127.451,76.887 h1.26 r90; Top Assembly "3" at 120.583,77.801 h1.26 r90
U$3: Top Overlay "Pulse" at 147.676,93.904 h1.97 r90
U$15: Top Overlay "750370040" at 115.849,35.941 h1.97 r90; Top Overlay "WURTH" at 117.754,35.941 h1.97 r90
X2: Assembly Text Bottom "0.043in/1.1mm" at 49.009,93.016 h0.64 r270
X3: Assembly Text Bottom "1.035in/26.289mm" at 32.631,82.362 h0.64 r270; Assembly Text Bottom "0.157in/4mm" at 43.776,82.044 h0.64 r270; Assembly Text Bottom "-0.228in/-5.8mm" at 38.875,75.059 h0.64 r270; Assembly Text Bottom "0in/0mm" at 41.775,36.692 h0.64 r270; Assembly Text Bottom "1.098in/27.889mm" at 57.264,56.225 h0.64 r270; Assembly Text Bottom "0.862in/21.9mm" at 54.724,55.907 h0.64 r270; Assembly Text Bottom "0.043in/1.1mm" at 49.009,61.524 h0.64 r270; Assembly Text Bottom "Alt Padstyle 2: OX90Y60D30P" at 2.405,62.257 h1.27 r270; Assembly Text Bottom "Alt Padstyle 1: OX60Y90D30P" at 4.31,62.257 h1.27 r270; Assembly Text Bottom "Right Mtg Padstyle: EX60Y60D30P" at 6.215,63.527 h1.27 r270; Assembly Text Bottom "Left Mtg Padstyle: EX60Y60D30P" at 8.12,63.21 h1.27 r270; Assembly Text Bottom "3rd Mtg Padstyle: EX70Y70D70P" at 10.025,62.892 h1.27 r270; Assembly Text Bottom "2nd Mtg Padstyle: EX70Y70D70P" at 11.93,62.892 h1.27 r270; Assembly Text Bottom "1st Mtg Padstyle: EX126Y126D126P" at 13.835,63.845 h1.27 r270; Assembly Text Bottom "Default Padstyle: EX59Y59D39P" at 15.74,62.892 h1.27 r270